# Altium PCB ScreenBoard.PcbDoc
Units mm, origin at the board's own origin, x right, y up, seen from the top; angles counter-clockwise.
Board outline 88.14 x 71.63 mm, 2 copper layers (Top Layer, Bottom Layer); 43 components, 41 nets, 216 pads, 1557 vias.
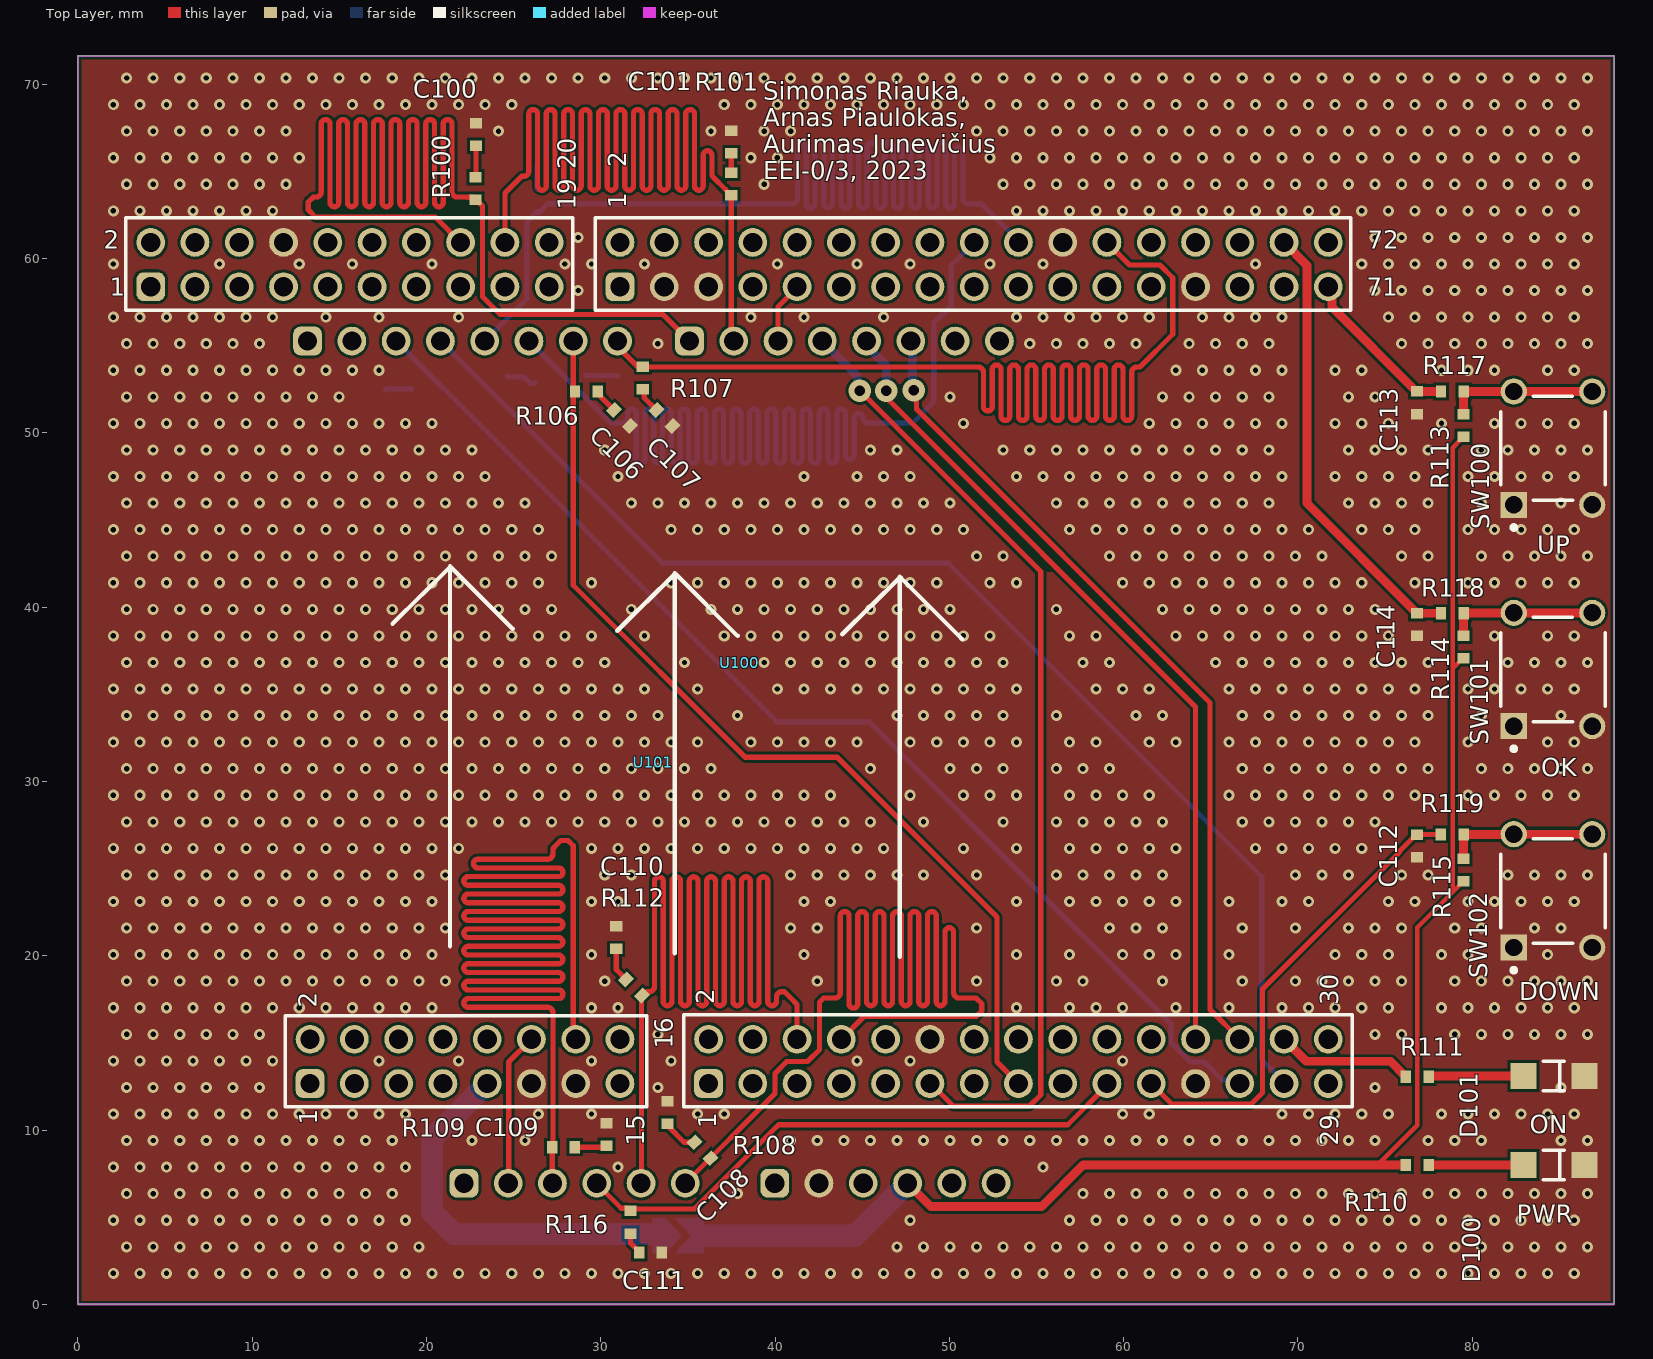
[diagram p0: Top Layer view]
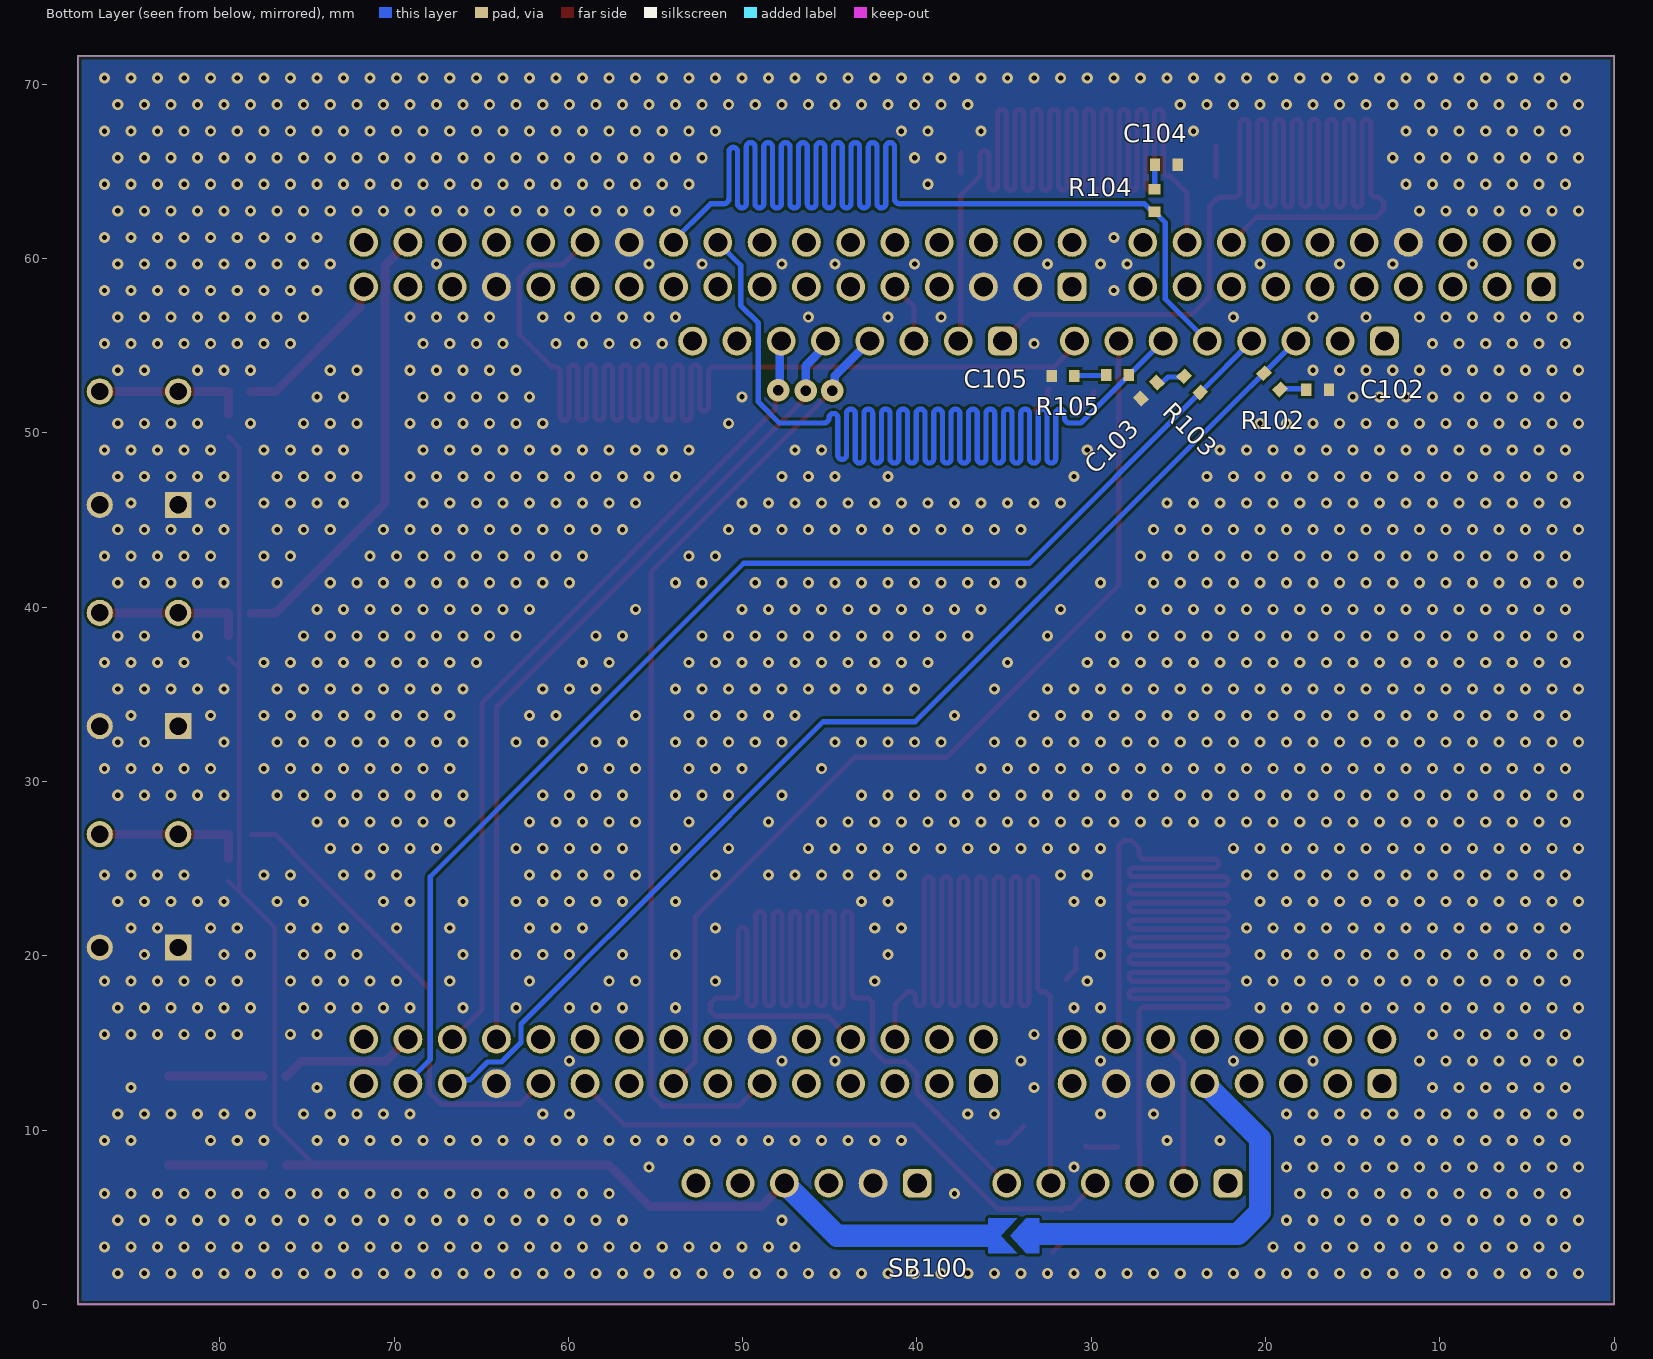
[diagram p1: Bottom Layer view, seen from below]

## Layer stack, top to bottom
Top Solder: solder mask 0.0102, Solder Resist, Dk 3.5
Top Layer: signal copper 0.0356
Dielectric 1: dielectric 0.32, FR-4, Dk 4.8
Bottom Layer: signal copper 0.0356
Bottom Solder: solder mask 0.0102, Solder Resist, Dk 3.5

## Board outline
0,0 88.138,0 88.138,71.628 0,71.628

## Design rules (kind name [scope] priority, off if disabled: settings)
Clearance [All] p1: gap=0.152 ignorepadtopadclearanceinfootprint=FALSE
HoleSize [All] p1: absolutevalues=TRUE maxlimit=2.54 minlimit=0.3 maxpercent=80.000 minpercent=20.000
MinimumAnnularRing [All] p1: minimumring=0.152
MinimumSolderMaskSliver [All] p1: minsoldermaskwidth=0.152
PolygonConnect [All] p1: connectstyle=Direct reliefconductorwidth=0.254 reliefentries=4 polygonreliefangle="90 Angle" airgapwidth=0.254
RoutingVias [All] p1: holewidth=0.3 width=0.604 viastyle="Through Hole" minholewidth=0.3 minwidth=0.604 maxholewidth=100 maxwidth=1.27
SilkToSolderMaskClearance [IsPad] p1: minsilkscreentomaskgap=0.15 clearancetoexposedcopper=TRUE
SolderMaskExpansion [All] p1: expansion=0.102 istentingtop=FALSE
Width [All] p1: maxlimit=1.27 minlimit=0.152 preferedwidth=0.254 minimp=50.000000 maximp=50.000000 favimp=50.000000
27 further rules are at their usual default settings.

## Components (designator, comment, footprint, x,y, rotation, side; value= is the part's Value field where it differs from the comment)
C100 "0.1uF" 0402_footprint 22.835,66.472 r90 top
C101 "0.1uF" 0402_footprint 37.49,66.04 r90 top
C102 "0.1uF" 0402_footprint 17.658,52.476 r180 bottom
C103 "0.1uF" 0402_footprint 26.233,52.888 r315 bottom
C104 "0.1uF" 0402_footprint 26.34,65.38 r180 bottom
C105 "0.1uF" 0402_footprint 30.963,53.264 r0 bottom
C106 "0.1uF" 0402_footprint 30.755,51.313 r315 top
C107 "0.1uF" 0402_footprint 33.198,51.308 r315 top
C108 "0.1uF" 0402_footprint 33.833,10.359 r90 top
C109 "0.1uF" 0402_footprint 30.328,9.093 r90 top
C110 "0.1uF" 0402_footprint 30.886,20.392 r90 top
C111 "0.1uF" 0402_footprint 32.203,2.972 r0 top
C112 "0.1uF" 0402_footprint 76.835,26.949 r270 top
C113 "33nF" 0402_footprint 76.835,52.375 r270 top
C114 "33nF" 0402_footprint 76.835,39.649 r270 top
D100 "HSMG-C150" FP-HSMG-C150-MFG 84.684,8.001 r180 top
D101 "HSMG-C150" FP-HSMG-C150-MFG 84.684,13.106 r180 top
R100 "4.7kOhm" 0402_footprint 22.809,64.668 r270 top
R101 "4.7kOhm" 0402_footprint 37.49,63.627 r90 top
R102 "4.7kOhm" 0402_footprint 19.172,52.497 r45 bottom
R103 "4.7kOhm" 0402_footprint 23.749,52.324 r45 bottom
R104 "4.7kOhm" 0402_footprint 26.365,63.983 r270 bottom
R105 "4.7kOhm" 0402_footprint 27.834,53.315 r0 bottom
R106 "4.7kOhm" 0402_footprint 29.82,52.375 r180 top
R107 "4.7kOhm" 0402_footprint 32.41,52.502 r90 top
R108 "4.7kOhm" 0402_footprint 36.297,8.382 r135 top
R109 "4.7kOhm" 0402_footprint 28.503,9.017 r180 top
R110 "150" 0402_footprint 77.495,8.001 r180 top
R111 "43" 0402_FOOTPRINT 77.495,13.056 r180 top
R112 "4.7kOhm" 0402_footprint 32.364,17.724 r135 top
R113 "10k" 0402_footprint 79.502,51.079 r270 top
R114 "10k" 0402_footprint 79.502,38.359 r270 top
R115 "0402" 0402_footprint 79.502,25.578 r270 top
R116 "4.7kOhm" 0402_footprint 31.699,4.059 r90 top
R117 "2k" 0402_footprint 79.507,52.375 r180 top
R118 "2k" 0402_footprint 79.507,39.649 r180 top
R119 "0402" 0402_footprint 79.502,26.949 r180 top
SB100 "Solder_bridge" SOLDER_BRIDGE 33.909,3.937 r0 bottom
SW100 "1825910-6" TECO-1825910-6_V 84.633,49.119 r90 top
SW101 "1825910-6" TECO-1825910-6_V 84.633,36.424 r90 top
SW102 "1825910-6" TECO-1825910-6_V 84.633,23.724 r90 top locked
U100 "NUCLEO-H755ZL_Zio" H7/H5_NUCLEO_ZIO -17.158,6.108 r90 top locked
U101 "3'5_LCD_ARDUINO" 3'5_LCD_ARDUINO 22.149,6.95 r90 top locked

## Footprints (in the part's own frame and the unit in brackets; to place one, negate y for a bottom-side part, rotate by r counter-clockwise, add the part's x,y. Pads: shape width x height; smd on the part's side, far side on the other; paste and mask are expansions set on the pad)
3'5_LCD_ARDUINO [mm]
  rrect50% 1.65x1.65 hole 1.1: 1(0,0) 7(0,-17.83) 13(48.32,8.97) 21(48.32,-12.94)
  round 1.65 hole 1.1: 2(0,-2.54) 3(0,-5.08) 4(0,-7.62) 5(0,-10.16) 6(0,-12.7) 8(0,-20.37) 9(0,-22.91) 10(0,-25.45) 11(0,-27.99) 12(0,-30.53) 14(48.32,6.43) 15(48.32,3.89) 16(48.32,1.35) 17(48.32,-1.19) 18(48.32,-3.73) 19(48.32,-6.27) 20(48.32,-8.81) 22(48.32,-15.48) 23(48.32,-18.02) 24(48.32,-20.56) 25(48.32,-23.1) 26(48.32,-25.64) 27(48.32,-28.18) 28(48.32,-30.72)
  silkscreen extent 13,-28.6 35.4,4.1
0402_footprint [mm]
  rect 0.6x0.7 smd: 1(0,0) 2(1.3,0)
0402_FOOTPRINT [mm]
  rect 0.6x0.7 smd: 1(0,0) 2(1.3,0)
FP-HSMG-C150-MFG [mm]
  rect 1.5x1.5 smd paste+0 mask+0: 1(-1.75,0) 2(1.75,0)
  silkscreen extent -0.6,-0.85 0.6,0.85, body extent -2.6,-0.95 2.6,0.95, height 0.25
H7/H5_NUCLEO_ZIO [mm]
  rrect50% 1.65x1.65 hole 1.1: 1(6.56,-30.48) 17(6.56,-53.34) 47(52.28,-21.336) 67(52.28,-48.26)
  round 1.65 hole 1.1: 2(9.1,-30.48) 3(6.56,-33.02) 4(9.1,-33.02) 5(6.56,-35.56) 6(9.1,-35.56) 7(6.56,-38.1) 8(9.1,-38.1) 9(6.56,-40.64) 10(9.1,-40.64) 11(6.56,-43.18) 12(9.1,-43.18) 13(6.56,-45.72) 14(9.1,-45.72) 15(6.56,-48.26) 16(9.1,-48.26) 18(9.1,-53.34) 19(6.56,-55.88) 20(9.1,-55.88) 21(6.56,-58.42) 22(9.1,-58.42) 23(6.56,-60.96) 24(9.1,-60.96) 25(6.56,-63.5) 26(9.1,-63.5) 27(6.56,-66.04) 28(9.1,-66.04) 29(6.56,-68.58) 30(9.1,-68.58) 31(6.56,-71.12) 32(9.1,-71.12) 33(6.56,-73.66) 34(9.1,-73.66) 35(6.56,-76.2) 36(9.1,-76.2) 37(6.56,-78.74) 38(9.1,-78.74) 39(6.56,-81.28) 40(9.1,-81.28) 41(6.56,-83.82) 42(9.1,-83.82) 43(6.56,-86.36) 44(9.1,-86.36) 45(6.56,-88.9) 46(9.1,-88.9) 48(54.82,-21.336) 49(52.28,-23.876) 50(54.82,-23.876) 51(52.28,-26.416) 52(54.82,-26.416) 53(52.28,-28.956) 54(54.82,-28.956) 55(52.28,-31.496) 56(54.82,-31.496) 57(52.28,-34.036) 58(54.82,-34.036) 59(52.28,-36.576) 60(54.82,-36.576) 61(52.28,-39.116) 62(54.82,-39.116) 63(52.28,-41.656) 64(54.82,-41.656) 65(52.28,-44.196) 66(54.82,-44.196) 68(54.82,-48.26) 69(52.28,-50.8) 70(54.82,-50.8) 71(52.28,-53.34) 72(54.82,-53.34) 73(52.28,-55.88) 74(54.82,-55.88) 75(52.28,-58.42) 76(54.82,-58.42) 77(52.28,-60.96) 78(54.82,-60.96) 79(52.28,-63.5) 80(54.82,-63.5) 81(52.28,-66.04) 82(54.82,-66.04) 83(52.28,-68.58) 84(54.82,-68.58) 85(52.28,-71.12) 86(54.82,-71.12) 87(52.28,-73.66) 88(54.82,-73.66) 89(52.28,-76.2) 90(54.82,-76.2) 91(52.28,-78.74) 92(54.82,-78.74) 93(52.28,-81.28) 94(54.82,-81.28) 95(52.28,-83.82) 96(54.82,-83.82) 97(52.28,-86.36) 98(54.82,-86.36) 99(52.28,-88.9) 100(54.82,-88.9)
  silkscreen extent 5.21,-90.26 56.22,-19.92
SOLDER_BRIDGE [mil]
  round 1 smd mask+1.97: 1(-36,1) 2(77,0)
  Top Layer pour cut-out: -7,42.98 -7,-43 11,-43 50.85,0.04 11,42.98
  Top Layer region: -36,-39.37 -36,39.37 -6.97,39.37 28.46,0 -6.97,-39.37
  Top Layer region: 79,39.37 79,-39.42 13,-40 50,0 13,39.37
TECO-1825910-6_V [mm] "Switch, 4-Leads, Body 5.99x5.99mm"
  rect 1.5x1.5 hole 0.99: 1(-3.25,2.25)
  round 1.5 hole 0.99: 2(3.25,2.25) 3(-3.25,-2.25) 4(3.25,-2.25)
  silkscreen extent -4.67,-2.99 2.99,3, body extent -3,-2.99 2.99,3, height 5

## Part data
C100 C101 C102 C103 C104 C105 C106 C107 C108 C109 C110 C111 C112 C113 C114: library part Capacitor_0402, "0402 capacitor"
D100 D101: library part CMP-2000-05061-2, "LED GREEN DIFFUSED 1206 SMD", Colour=Green, Forward Current=20mA, Forward Voltage=2.2V, Manufacturer=Broadcom, Max Junction Temp=+95°C, Power Dissipation=65mW, Reverse Voltage=5V, Temperature="-40°C to +85°C", Temperature Range High=+85°C, Temperature Range Low=-40°C, Automotive=No, Category=Diode, ComponentLink2Description=Buy, ComponentLink2URL=https://www.mouser.lt/ProductDetail/Wurth-Elektronik/156120RS75000?qs=2kOmHSv6VfTlw4DhG%252BTIQw%3D%3D, Device Class L1=Optoelectronics, Device Class L2=LEDs, Device Class L3=unset, Digikey Description="LED GREEN DIFFUSED 1206 SMD", Height=1.2mm, Ipc Land Pattern Name=DIOCP320160X55, Lead Free=Yes, Led Orientation="Top View", Luminous Intensity=15mcd, Manufacturer Part Number=HSMG-C150, Mouser Description="LED Uni-Color Green 570nm 2-Pin Chip LED T/R", Octopart=https://octopart.com/hsmg-c150-broadcom-71131304, Package=HSMG-C150, Peak Emmision Wavelength=570nm, RoHS=TRUE, Viewing Angle=170°, Wavelength=572nm
R100 R101 R102 R103 R104 R105 R106 R107 R108 R109 R110 R111 R112 R113 R114 R115 R116 R117 R118 R119: library part Resistor_0402, "0402 resistor"
SW100 SW101 SW102: library part CMP-1684-00021-1, "Tact Switch, SPST-NO, 0.05 A, -35 to 85 degC, 4-Pin THD, RoHS, Bulk", Actuator Color=Black, Contact Rating @ Voltage=0.05A@24VDC, Dielectric Strength=500VAC, Manufacturer="TE Connectivity", Maximum AC Voltage Rating=N/A, Maximum Contact Resistance=100mOhm, Maximum DC Voltage Rating=24V, Minimum Insulation Resistance=100MOhm, Operating Temperature=-35to85C, Package Description="4-Pin Through Hole Device, Body 5.99 x 5.99 mm, Pitch 6.5 mm", Package Reference=THD, Actuator Length=1.4mm, Actuator Material=PolybutyleneTerephthalate, Actuator Style=RoundButton, Base Material=N/A, Body Orientation=Straight, Bushing Type=Unthreaded, ComponentLink1Description=Buy, ComponentLink1URL=https://www.mouser.lt/ProductDetail/CUI-Devices/TS02-66-55-BK-260-LCR-D?qs=A6eO%252BMLsxmT6x4NEvNu8bQ%3D%3D, Contact Material=CopperAlloy, Contact Plating=Silver, Datasheet URL=http://www.te.com/commerce/DocumentDelivery/DDEController?Action=showdoc&DocId=Customer+Drawing%7F1825910%7FC9%7Fpdf%7FEnglish%7FENG_CD_1825910_C9.pdf%7F1825910-6, Datasheet Version="Rev. C9", Dimension=5.99x5mm, Electrical Life=100000Cycles, Family=1825910, Function=MomentaryContact, Housing Material=N/A, Illumination=N/R, Manufacturer URL=http://www.te.com, Mechanical Life=100000Cycles, Mounting=ThroughHole, Packaging=N/A, Part No=1825910-6, Pole Throw Configuration=SPST, Product Weight=N/A, RoHS=Yes, Seal Description=N/A, Seal Location=N/A, Switch Configuration=OFF(ON), Terminal Type=PCPins, Thread Size=N/R

## Via types
v1: diameter 0.635, hole 0.305, Top Layer to Bottom Layer, tented both sides, 1554 vias
v2: diameter 1.3, hole 0.6, Top Layer to Bottom Layer, tented both sides, 3 vias

## Nets (pads, with @x,y where several pads share a name; then routed paths per layer and width w, separated by ;. In a path a pad name is that pad's centre, name@x,y a point inside that pad or via, vN(x,y) a via of type N, cw(c..) or ccw(c..) an arc to the next point about the centre after c; other vN are vias at no path point)
5V: SB100.1 U100.9 | length 22.2
  Bottom Layer w1.27: U100.9 20.32,9.506 20.32,5.291 21.581,4.03 33.346,4.03
BTN_1: C113.1 R117.2 U100.99 | length 9.5
  Top Layer w0.508: U100.99 71.96,58.169 71.96,57.199 76.785,52.375 C113.1 R117.2
BTN_2: C114.1 R118.2 U100.98 | length 25.8
  Top Layer w0.508: U100.98 70.51,59.619 70.51,45.974 76.739,39.745 76.739,39.695 76.785,39.649 R118.2
BTN_3: C112.1 R119.2 U100.37 | length 27
  Top Layer w0.3: U100.37 62.769,11.481 67.31,11.481 67.971,12.142 67.971,18.085 75.828,25.942 75.828,25.992 76.785,26.949 C112.1 R119.2
BTN_PWR: R110.2 R113.2 R114.2 R115.2 SB100.2 U101.10 | length 88.7
  Top Layer w0.254: 74.574,8.001 76.848,10.275 76.848,21.624 78.945,23.721 ; R115.2 78.945,23.721 ; R114.2 79.452,37.059 78.873,36.48 ; R113.2 79.452,49.779 79.279,49.606 79.279,49.556 78.873,49.15 78.873,36.48 ; 78.873,36.48 78.873,23.794 78.945,23.721
  Top Layer w0.508: U101.10 48.935,5.613 55.297,5.613 57.685,8.001 74.574,8.001 R110.2
  Bottom Layer w1.27: SB100.2 44.586,3.937 U101.10
CS: R109.2 U100.14 U101.3 | length 128
  Top Layer w0.3: U101.3 27.216,6.962 27.216,9.004 R109.2 27.253,9.067 27.253,16.59 27.253,16.74 ccw(c26.953,16.74) 26.953,17.04 22.39,17.04 cw(c22.39,17.29) 22.39,17.54 27.573,17.54 ccw(c27.573,17.79) 27.573,18.04 22.39,18.04 cw(c22.39,18.29) 22.39,18.54 27.573,18.54 ccw(c27.573,18.79) 27.573,19.04 22.39,19.04 cw(c22.39,19.29) 22.39,19.54 27.573,19.54 ccw(c27.573,19.79) 27.573,20.04 22.39,20.04 cw(c22.39,20.29) 22.39,20.54 27.573,20.54 ccw(c27.573,20.79) 27.573,21.04 22.39,21.04 cw(c22.39,21.29) 22.39,21.54 27.573,21.54 ccw(c27.573,21.79) 27.573,22.04 22.39,22.04 cw(c22.39,22.29) 22.39,22.54 27.573,22.54 ccw(c27.573,22.79) 27.573,23.04 22.39,23.04 cw(c22.39,23.29) 22.39,23.54 27.573,23.54 ccw(c27.573,23.79) 27.573,24.04 22.39,24.04 cw(c22.39,24.29) 22.39,24.54 27.573,24.54 ccw(c27.573,24.79) 27.573,25.04 22.94,25.04 cw(c22.94,25.29) 22.94,25.54 26.953,25.54 ccw(c26.953,25.84) 27.253,25.84 27.253,26.161 27.503,26.41 27.704,26.612 28.125,26.612 28.423,26.314 28.423,15.347 U100.14
D0: R100.2 U100.62 U101.21 | length 113.9
  Top Layer w0.3: U100.62 20.512,62.374 13.648,62.374 13.211,62.811 13.211,63.232 13.508,63.53 13.513,63.53 13.663,63.53 ccw(c13.663,63.83) 13.963,63.83 13.963,67.725 cw(c14.213,67.725) 14.463,67.725 14.463,63.224 ccw(c14.713,63.224) 14.963,63.224 14.963,67.725 cw(c15.213,67.725) 15.463,67.725 15.463,63.224 ccw(c15.713,63.224) 15.963,63.224 15.963,67.725 cw(c16.213,67.725) 16.463,67.725 16.463,63.224 ccw(c16.713,63.224) 16.963,63.224 16.963,67.725 cw(c17.213,67.725) 17.463,67.725 17.463,63.224 ccw(c17.713,63.224) 17.963,63.224 17.963,67.725 cw(c18.213,67.725) 18.463,67.725 18.463,63.224 ccw(c18.713,63.224) 18.963,63.224 18.963,67.725 cw(c19.213,67.725) 19.463,67.725 19.463,63.224 ccw(c19.713,63.224) 19.963,63.224 19.963,67.725 cw(c20.212,67.725) 20.462,67.725 20.462,63.224 ccw(c20.712,63.224) 20.962,63.224 20.962,67.725 cw(c21.212,67.725) 21.462,67.725 21.462,63.83 ccw(c21.762,63.83) 21.762,63.53 22.361,63.53 22.372,63.518 22.659,63.518 R100.2 22.859,63.368 23.216,63.012 23.216,57.81 24.232,56.794 33.564,56.794 U101.21
D1: R101.1 U100.64 U101.22 | length 116
  Top Layer w0.3: U100.64 24.498,63.753 25.424,64.679 25.464,64.719 25.574,64.719 ccw(c25.574,65.019) 25.874,65.019 25.874,68.301 cw(c26.124,68.301) 26.374,68.301 26.374,64.169 ccw(c26.624,64.169) 26.874,64.169 26.874,68.301 cw(c27.124,68.301) 27.374,68.301 27.374,64.169 ccw(c27.624,64.169) 27.874,64.169 27.874,68.301 cw(c28.124,68.301) 28.374,68.301 28.374,64.169 ccw(c28.624,64.169) 28.874,64.169 28.874,68.301 cw(c29.124,68.301) 29.374,68.301 29.374,64.169 ccw(c29.624,64.169) 29.874,64.169 29.874,68.301 cw(c30.124,68.301) 30.374,68.301 30.374,64.169 ccw(c30.624,64.169) 30.874,64.169 30.874,68.301 cw(c31.124,68.301) 31.374,68.301 31.374,64.169 ccw(c31.624,64.169) 31.874,64.169 31.874,68.301 cw(c32.124,68.301) 32.374,68.301 32.374,64.169 ccw(c32.624,64.169) 32.874,64.169 32.874,68.301 cw(c33.124,68.301) 33.374,68.301 33.374,64.169 ccw(c33.624,64.169) 33.874,64.169 33.874,68.301 cw(c34.124,68.301) 34.374,68.301 34.374,64.169 ccw(c34.624,64.169) 34.874,64.169 34.874,68.301 cw(c35.124,68.301) 35.374,68.301 35.374,64.169 ccw(c35.624,64.169) 35.874,64.169 35.874,65.937 cw(c36.124,65.937) 36.374,65.937 36.374,64.868 ccw(c36.674,64.868) 36.461,64.656 37.141,63.976 R101.1 37.49,55.408 U101.22
D2: R102.2 U100.41 U101.15 | length 66.7
  Bottom Layer w0.3: U101.15 R102.2@20.142,53.386 ; R102.2 20.121,53.386 R102.2@20.142,53.386 ; 59.494,19.306 62.709,16.092 62.709,15.025 63.834,13.899 64.632,13.899 65.648,12.883 66.447,12.883 U100.41 ; 59.502,19.314 56.012,22.804 45.39,33.426 40.102,33.426 21.631,51.897 R102.2@20.142,53.386
D3: R103.1 U100.43 U101.16 | length 72.4
  Bottom Layer w0.3: U101.16 23.745,52.324 R103.1 23.749,52.32 33.549,42.52 49.936,42.52 67.92,24.536 67.92,14.046 69.303,12.662 69.208,12.662 U100.43
D4: R104.2 U100.86 U101.17 | length 107.1
  Bottom Layer w0.3: U101.17 25.756,57.687 25.756,62.073 26.165,62.483 26.165,62.533 26.315,62.683 R104.2 ; R104.2@26.451,62.646 26.949,63.144 40.837,63.144 40.987,63.144 ccw(c40.987,63.444) 41.287,63.444 41.287,66.402 cw(c41.537,66.402) 41.787,66.402 41.787,63.155 ccw(c42.037,63.155) 42.287,63.155 42.287,66.402 cw(c42.537,66.402) 42.787,66.402 42.787,63.155 ccw(c43.037,63.155) 43.287,63.155 43.287,66.402 cw(c43.537,66.402) 43.787,66.402 43.787,63.155 ccw(c44.037,63.155) 44.287,63.155 44.287,66.402 cw(c44.537,66.402) 44.787,66.402 44.787,63.155 ccw(c45.037,63.155) 45.287,63.155 45.287,66.402 cw(c45.537,66.402) 45.787,66.402 45.787,63.155 ccw(c46.037,63.155) 46.287,63.155 46.287,66.402 cw(c46.537,66.402) 46.787,66.402 46.787,63.155 ccw(c47.037,63.155) 47.287,63.155 47.287,66.402 cw(c47.537,66.402) 47.787,66.402 47.787,63.155 ccw(c48.037,63.155) 48.287,63.155 48.287,66.402 cw(c48.537,66.402) 48.787,66.402 48.787,63.155 ccw(c49.037,63.155) 49.287,63.155 49.287,66.402 cw(c49.537,66.402) 49.787,66.402 49.787,63.155 ccw(c50.037,63.155) 50.287,63.155 50.287,66.134 cw(c50.537,66.134) 50.787,66.134 50.787,63.444 ccw(c51.087,63.444) 51.087,63.144 51.841,63.144 51.905,63.081 ; 51.907,63.079 54.063,60.922 53.968,60.922 U100.86
D5: R105.1 U100.84 U101.18 | length 111
  Bottom Layer w0.3: U101.18 30.582,50.567 31.09,50.567 31.24,50.567 ccw(c31.24,50.867) 31.54,50.867 31.54,51.117 cw(c31.79,51.117) 32.04,51.117 32.04,48.517 ccw(c32.29,48.517) 32.54,48.517 32.54,51.117 cw(c32.79,51.117) 33.04,51.117 33.04,48.517 ccw(c33.29,48.517) 33.54,48.517 33.54,51.117 cw(c33.79,51.117) 34.04,51.117 34.04,48.517 ccw(c34.29,48.517) 34.54,48.517 34.54,51.117 cw(c34.79,51.117) 35.04,51.117 35.04,48.517 ccw(c35.29,48.517) 35.54,48.517 35.54,51.117 cw(c35.79,51.117) 36.04,51.117 36.04,48.517 ccw(c36.29,48.517) 36.54,48.517 36.54,51.117 cw(c36.79,51.117) 37.04,51.117 37.04,48.517 ccw(c37.29,48.517) 37.54,48.517 37.54,51.117 cw(c37.79,51.117) 38.04,51.117 38.04,48.517 ccw(c38.29,48.517) 38.54,48.517 38.54,51.117 cw(c38.79,51.117) 39.04,51.117 39.04,48.517 ccw(c39.29,48.517) 39.54,48.517 39.54,51.117 cw(c39.79,51.117) 40.04,51.117 40.04,48.517 ccw(c40.29,48.517) 40.54,48.517 40.54,51.117 cw(c40.79,51.117) 41.04,51.117 41.04,48.517 ccw(c41.29,48.517) 41.54,48.517 41.54,51.117 cw(c41.79,51.117) 42.04,51.117 42.04,48.517 ccw(c42.29,48.517) 42.54,48.517 42.54,51.117 cw(c42.79,51.117) 43.04,51.117 43.04,48.517 ccw(c43.29,48.517) 43.54,48.517 43.54,51.117 cw(c43.79,51.117) 44.04,51.117 44.04,48.73 ccw(c44.29,48.73) 44.54,48.73 44.54,50.867 cw(c44.79,50.867) 45.04,50.867 ccw(c45.34,50.867) 45.34,50.567 46.279,50.567 47.9,50.567 49.097,51.764 49.097,56.301 50.113,57.316 50.113,59.619 U100.84
D6: R106.2 U100.31 U101.19 | length 56.4
  Top Layer w0.3: U101.19 28.419,52.476 R106.2 28.419,52.274 28.419,41.253 38.278,31.394 43.559,31.394 52.73,22.223 52.73,13.899 U100.31
D7: R107.2 U100.90 U101.20 | length 93.3
  Top Layer w0.3: U101.20 30.959,54.961 31.41,54.509 31.41,54.493 32.129,53.773 50.814,53.773 51.659,53.773 cw(c51.659,53.473) 51.959,53.473 51.959,51.506 ccw(c52.209,51.506) 52.459,51.506 52.459,53.645 cw(c52.709,53.645) 52.959,53.645 52.959,50.962 ccw(c53.209,50.962) 53.459,50.962 53.459,53.645 cw(c53.709,53.645) 53.959,53.645 53.959,50.962 ccw(c54.209,50.962) 54.459,50.962 54.459,53.645 cw(c54.709,53.645) 54.959,53.645 54.959,50.962 ccw(c55.209,50.962) 55.459,50.962 55.459,53.645 cw(c55.709,53.645) 55.959,53.645 55.959,50.962 ccw(c56.209,50.962) 56.459,50.962 56.459,53.645 cw(c56.709,53.645) 56.959,53.645 56.959,50.962 ccw(c57.209,50.962) 57.459,50.962 57.459,53.645 cw(c57.709,53.645) 57.959,53.645 57.959,50.962 ccw(c58.209,50.962) 58.459,50.962 58.459,53.645 cw(c58.709,53.645) 58.959,53.645 58.959,50.962 ccw(c59.209,50.962) 59.459,50.962 59.459,53.645 cw(c59.709,53.645) 59.959,53.645 59.959,50.962 ccw(c60.209,50.962) 60.459,50.962 60.459,53.473 cw(c60.759,53.473) 60.759,53.773 60.909,53.773 60.931,53.773 62.813,55.656 62.813,58.898 62.077,59.634 60.336,59.634 U100.90
GND: C100.2 C101.2 C102.2 C103.2 C104.2 C105.2 C106.2 C107.2 C108.2 C109.2 C110.2 C111.2 C112.2 C113.2 C114.2 D100.1 D101.1 SW100.1 SW100.3 SW101.1 SW101.3 SW102.1 SW102.3 U100.11 U100.13 U100.28 U100.39 U100.54 U100.69 U100.71 U100.88 U100.93 U101.8
  other v1: 2.032,1.778 3.556,1.778 5.08,1.778 6.604,1.778 8.128,1.778 9.652,1.778 11.176,1.778 12.7,1.778 14.224,1.778 15.748,1.778 17.272,1.778 18.796,1.778 20.32,1.778 21.844,1.778 23.368,1.778 24.892,1.778 26.416,1.778 27.94,1.778 29.464,1.778 30.988,1.778 32.512,1.778 34.036,1.778 35.56,1.778 37.084,1.778 38.608,1.778 40.132,1.778 41.656,1.778 43.18,1.778 44.704,1.778 46.228,1.778 47.752,1.778 49.276,1.778 50.8,1.778 52.324,1.778 53.848,1.778 55.372,1.778 56.896,1.778 58.42,1.778 59.944,1.778 61.468,1.778 62.992,1.778 64.516,1.778 66.04,1.778 67.564,1.778 69.088,1.778 70.612,1.778 72.136,1.778 73.66,1.778 75.184,1.778 76.708,1.778 78.232,1.778 79.756,1.778 81.28,1.778 82.804,1.778 84.328,1.778 85.852,1.778 2.794,3.302 4.318,3.302 5.842,3.302 7.366,3.302 8.89,3.302 10.414,3.302 11.938,3.302 13.462,3.302 14.986,3.302 16.51,3.302 18.034,3.302 19.558,3.302 46.99,3.302 48.514,3.302 50.038,3.302 51.562,3.302 53.086,3.302 54.61,3.302 56.134,3.302 57.658,3.302 59.182,3.302 60.706,3.302 62.23,3.302 63.754,3.302 65.278,3.302 66.802,3.302 68.326,3.302 69.85,3.302 71.374,3.302 72.898,3.302 74.422,3.302 75.946,3.302 77.47,3.302 78.994,3.302 80.518,3.302 82.042,3.302 83.566,3.302 85.09,3.302 86.614,3.302 2.032,4.826 3.556,4.826 5.08,4.826 6.604,4.826 8.128,4.826 9.652,4.826 11.176,4.826 12.7,4.826 14.224,4.826 15.748,4.826 17.272,4.826 18.796,4.826 47.752,4.826 56.896,4.826 58.42,4.826 59.944,4.826 61.468,4.826 62.992,4.826 64.516,4.826 66.04,4.826 67.564,4.826 69.088,4.826 70.612,4.826 72.136,4.826 73.66,4.826 75.184,4.826 76.708,4.826 78.232,4.826 79.756,4.826 81.28,4.826 82.804,4.826 84.328,4.826 85.852,4.826 2.794,6.35 4.318,6.35 5.842,6.35 7.366,6.35 8.89,6.35 10.414,6.35 11.938,6.35 13.462,6.35 14.986,6.35 16.51,6.35 18.034,6.35 37.846,6.35 57.658,6.35 59.182,6.35 60.706,6.35 62.23,6.35 63.754,6.35 65.278,6.35 66.802,6.35 68.326,6.35 69.85,6.35 71.374,6.35 72.898,6.35 74.422,6.35 75.946,6.35 77.47,6.35 78.994,6.35 80.518,6.35 82.042,6.35 83.566,6.35 85.09,6.35 86.614,6.35 2.032,7.874 3.556,7.874 5.08,7.874 6.604,7.874 8.128,7.874 9.652,7.874 11.176,7.874 12.7,7.874 14.224,7.874 15.748,7.874 17.272,7.874 18.796,7.874 30.988,7.874 55.372,7.874 2.794,9.398 4.318,9.398 5.842,9.398 7.366,9.398 8.89,9.398 10.414,9.398 11.938,9.398 13.462,9.398 14.986,9.398 16.51,9.398 18.034,9.398 22.606,9.398 25.654,9.398 40.894,9.398 42.418,9.398 43.942,9.398 45.466,9.398 46.99,9.398 48.514,9.398 50.038,9.398 51.562,9.398 53.086,9.398 54.61,9.398 56.134,9.398 57.658,9.398 59.182,9.398 60.706,9.398 62.23,9.398 63.754,9.398 65.278,9.398 66.802,9.398 68.326,9.398 69.85,9.398 71.374,9.398 72.898,9.398 74.422,9.398 77.47,9.398 78.994,9.398 80.518,9.398 85.09,9.398 86.614,9.398 2.032,10.922 3.556,10.922 5.08,10.922 6.604,10.922 8.128,10.922 9.652,10.922 11.176,10.922 12.7,10.922 14.224,10.922 15.748,10.922 17.272,10.922 18.796,10.922 26.416,10.922 29.464,10.922 35.56,10.922 37.084,10.922 59.944,10.922 61.468,10.922 69.088,10.922 70.612,10.922 72.136,10.922 73.66,10.922 75.184,10.922 78.232,10.922 79.756,10.922 81.28,10.922 82.804,10.922 84.328,10.922 85.852,10.922 2.794,12.446 4.318,12.446 5.842,12.446 7.366,12.446 8.89,12.446 10.414,12.446 33.274,12.446 74.422,12.446 85.09,12.446 2.032,13.97 3.556,13.97 5.08,13.97 6.604,13.97 8.128,13.97 9.652,13.97 11.176,13.97 17.272,13.97 21.844,13.97 29.464,13.97 34.036,13.97 44.704,13.97 47.752,13.97 59.944,13.97 2.794,15.494 4.318,15.494 5.842,15.494 7.366,15.494 8.89,15.494 10.414,15.494 33.274,15.494 74.422,15.494 75.946,15.494 78.994,15.494 80.518,15.494 82.042,15.494 83.566,15.494 85.09,15.494 86.614,15.494 2.032,17.018 3.556,17.018 5.08,17.018 6.604,17.018 8.128,17.018 9.652,17.018 11.176,17.018 12.7,17.018 14.224,17.018 15.748,17.018 17.272,17.018 18.796,17.018 20.32,17.018 29.464,17.018 30.988,17.018 53.848,17.018 56.896,17.018 58.42,17.018 59.944,17.018 62.992,17.018 66.04,17.018 69.088,17.018 70.612,17.018 72.136,17.018 73.66,17.018 75.184,17.018 78.232,17.018 79.756,17.018 81.28,17.018 82.804,17.018 84.328,17.018 85.852,17.018 2.794,18.542 4.318,18.542 5.842,18.542 7.366,18.542 8.89,18.542 10.414,18.542 11.938,18.542 13.462,18.542 14.986,18.542 16.51,18.542 18.034,18.542 19.558,18.542 21.082,18.542 30.226,18.542 42.418,18.542 51.562,18.542 56.134,18.542 57.658,18.542 62.23,18.542 66.802,18.542 69.85,18.542 71.374,18.542 72.898,18.542 74.422,18.542 75.946,18.542 78.994,18.542 80.518,18.542 82.042,18.542 83.566,18.542 85.09,18.542 86.614,18.542 2.032,20.066 3.556,20.066 5.08,20.066 6.604,20.066 8.128,20.066 9.652,20.066 11.176,20.066 12.7,20.066 14.224,20.066 15.748,20.066 17.272,20.066 18.796,20.066 20.32,20.066 29.464,20.066 41.656,20.066 53.848,20.066 56.896,20.066 59.944,20.066 61.468,20.066 62.992,20.066 66.04,20.066 72.136,20.066 73.66,20.066 75.184,20.066 78.232,20.066 79.756,20.066 84.328,20.066 2.794,21.59 4.318,21.59 5.842,21.59 7.366,21.59 8.89,21.59 10.414,21.59 11.938,21.59 13.462,21.59 14.986,21.59 16.51,21.59 18.034,21.59 19.558,21.59 21.082,21.59 40.894,21.59 42.418,21.59 51.562,21.59 59.182,21.59 60.706,21.59 62.23,21.59 66.802,21.59 69.85,21.59 72.898,21.59 74.422,21.59 75.946,21.59 78.994,21.59 80.518,21.59 83.566,21.59 85.09,21.59 2.032,23.114 3.556,23.114 5.08,23.114 6.604,23.114 8.128,23.114 9.652,23.114 11.176,23.114 12.7,23.114 14.224,23.114 15.748,23.114 17.272,23.114 18.796,23.114 20.32,23.114 29.464,23.114 30.988,23.114 41.656,23.114 43.18,23.114 53.848,23.114 56.896,23.114 58.42,23.114 59.944,23.114 61.468,23.114 62.992,23.114 66.04,23.114 69.088,23.114 70.612,23.114 75.184,23.114 76.708,23.114 79.756,23.114 81.28,23.114 82.804,23.114 84.328,23.114 85.852,23.114 2.794,24.638 4.318,24.638 5.842,24.638 7.366,24.638 8.89,24.638 10.414,24.638 11.938,24.638 13.462,24.638 14.986,24.638 16.51,24.638 18.034,24.638 19.558,24.638 21.082,24.638 30.226,24.638 31.75,24.638 40.894,24.638 42.418,24.638 43.942,24.638 45.466,24.638 46.99,24.638 48.514,24.638 51.562,24.638 56.134,24.638 57.658,24.638 59.182,24.638 60.706,24.638 62.23,24.638 69.85,24.638 71.374,24.638 72.898,24.638 75.946,24.638 77.47,24.638 82.042,24.638 83.566,24.638 85.09,24.638 86.614,24.638 2.032,26.162 3.556,26.162 5.08,26.162 6.604,26.162 8.128,26.162 9.652,26.162 11.176,26.162 12.7,26.162 14.224,26.162 15.748,26.162 17.272,26.162 18.796,26.162 20.32,26.162 21.844,26.162 29.464,26.162 30.988,26.162 32.512,26.162 34.036,26.162 35.56,26.162 37.084,26.162 38.608,26.162 40.132,26.162 41.656,26.162 43.18,26.162 44.704,26.162 46.228,26.162 50.8,26.162 53.848,26.162 56.896,26.162 58.42,26.162 59.944,26.162 61.468,26.162 62.992,26.162 67.564,26.162 69.088,26.162 70.612,26.162 72.136,26.162 73.66,26.162 2.794,27.686 4.318,27.686 5.842,27.686 7.366,27.686 8.89,27.686 10.414,27.686 11.938,27.686 13.462,27.686 14.986,27.686 16.51,27.686 18.034,27.686 19.558,27.686 21.082,27.686 22.606,27.686 24.13,27.686 25.654,27.686 27.178,27.686 28.702,27.686 30.226,27.686 31.75,27.686 33.274,27.686 34.798,27.686 36.322,27.686 37.846,27.686 39.37,27.686 40.894,27.686 42.418,27.686 43.942,27.686 45.466,27.686 48.514,27.686 53.086,27.686 56.134,27.686 57.658,27.686 59.182,27.686 60.706,27.686 62.23,27.686 66.802,27.686 68.326,27.686 69.85,27.686 71.374,27.686 72.898,27.686 74.422,27.686 2.032,29.21 3.556,29.21 5.08,29.21 6.604,29.21 8.128,29.21 9.652,29.21 11.176,29.21 12.7,29.21 14.224,29.21 15.748,29.21 17.272,29.21 18.796,29.21 20.32,29.21 21.844,29.21 23.368,29.21 24.892,29.21 26.416,29.21 27.94,29.21 29.464,29.21 30.988,29.21 32.512,29.21 34.036,29.21 35.56,29.21 37.084,29.21 38.608,29.21 40.132,29.21 41.656,29.21 43.18,29.21 47.752,29.21 50.8,29.21 52.324,29.21 53.848,29.21 56.896,29.21 58.42,29.21 59.944,29.21 61.468,29.21 66.04,29.21 67.564,29.21 69.088,29.21 70.612,29.21 72.136,29.21 73.66,29.21 75.184,29.21 76.708,29.21 79.756,29.21 81.28,29.21 82.804,29.21 84.328,29.21 85.852,29.21 2.794,30.734 4.318,30.734 5.842,30.734 7.366,30.734 8.89,30.734 10.414,30.734 11.938,30.734 13.462,30.734 14.986,30.734 16.51,30.734 18.034,30.734 19.558,30.734 21.082,30.734 22.606,30.734 24.13,30.734 25.654,30.734 27.178,30.734 28.702,30.734 30.226,30.734 31.75,30.734 33.274,30.734 34.798,30.734 36.322,30.734 45.466,30.734 50.038,30.734 51.562,30.734 53.086,30.734 56.134,30.734 57.658,30.734 59.182,30.734 66.802,30.734 68.326,30.734 69.85,30.734 71.374,30.734 72.898,30.734 74.422,30.734 75.946,30.734 77.47,30.734 80.518,30.734 82.042,30.734 83.566,30.734 85.09,30.734 86.614,30.734 2.032,32.258 3.556,32.258 5.08,32.258 6.604,32.258 8.128,32.258 9.652,32.258 11.176,32.258 12.7,32.258 14.224,32.258 15.748,32.258 17.272,32.258 18.796,32.258 20.32,32.258 21.844,32.258 23.368,32.258 24.892,32.258 26.416,32.258 27.94,32.258 29.464,32.258 30.988,32.258 32.512,32.258 34.036,32.258 35.56,32.258 38.608,32.258 40.132,32.258 41.656,32.258 43.18,32.258 44.704,32.258 47.752,32.258 49.276,32.258 50.8,32.258 52.324,32.258 53.848,32.258 56.896,32.258 58.42,32.258 61.468,32.258 62.992,32.258 66.04,32.258 67.564,32.258 69.088,32.258 70.612,32.258 72.136,32.258 73.66,32.258 75.184,32.258 76.708,32.258 79.756,32.258 84.328,32.258 85.852,32.258 2.794,33.782 4.318,33.782 5.842,33.782 7.366,33.782 8.89,33.782 10.414,33.782 11.938,33.782 13.462,33.782 14.986,33.782 16.51,33.782 18.034,33.782 19.558,33.782 21.082,33.782 22.606,33.782 24.13,33.782 25.654,33.782 27.178,33.782 28.702,33.782 30.226,33.782 31.75,33.782 33.274,33.782 37.846,33.782 46.99,33.782 48.514,33.782 50.038,33.782 51.562,33.782 53.086,33.782 56.134,33.782 60.706,33.782 62.23,33.782 66.802,33.782 68.326,33.782 69.85,33.782 71.374,33.782 72.898,33.782 74.422,33.782 75.946,33.782 77.47,33.782 80.518,33.782 85.09,33.782 2.032,35.306 3.556,35.306 5.08,35.306 6.604,35.306 8.128,35.306 9.652,35.306 11.176,35.306 12.7,35.306 14.224,35.306 15.748,35.306 17.272,35.306 18.796,35.306 20.32,35.306 21.844,35.306 23.368,35.306 24.892,35.306 26.416,35.306 27.94,35.306 29.464,35.306 30.988,35.306 32.512,35.306 35.56,35.306 40.132,35.306 41.656,35.306 43.18,35.306 44.704,35.306 46.228,35.306 47.752,35.306 49.276,35.306 50.8,35.306 52.324,35.306 53.848,35.306 58.42,35.306 59.944,35.306 61.468,35.306 66.04,35.306 67.564,35.306 69.088,35.306 70.612,35.306 72.136,35.306 73.66,35.306 75.184,35.306 76.708,35.306 79.756,35.306 81.28,35.306 82.804,35.306 84.328,35.306 85.852,35.306 2.794,36.83 4.318,36.83 5.842,36.83 7.366,36.83 8.89,36.83 10.414,36.83 11.938,36.83 13.462,36.83 14.986,36.83 16.51,36.83 18.034,36.83 19.558,36.83 21.082,36.83 22.606,36.83 24.13,36.83 25.654,36.83 27.178,36.83 28.702,36.83 30.226,36.83 34.798,36.83 39.37,36.83 40.894,36.83 42.418,36.83 43.942,36.83 45.466,36.83 46.99,36.83 48.514,36.83 50.038,36.83 51.562,36.83 53.086,36.83 57.658,36.83 59.182,36.83 65.278,36.83 66.802,36.83 68.326,36.83 69.85,36.83 71.374,36.83 72.898,36.83 74.422,36.83 75.946,36.83 77.47,36.83 82.042,36.83 83.566,36.83 85.09,36.83 86.614,36.83 2.032,38.354 3.556,38.354 5.08,38.354 6.604,38.354 8.128,38.354 9.652,38.354 11.176,38.354 12.7,38.354 14.224,38.354 15.748,38.354 17.272,38.354 18.796,38.354 20.32,38.354 21.844,38.354 23.368,38.354 24.892,38.354 26.416,38.354 27.94,38.354 29.464,38.354 32.512,38.354 37.084,38.354 38.608,38.354 40.132,38.354 41.656,38.354 43.18,38.354 44.704,38.354 46.228,38.354 47.752,38.354 49.276,38.354 50.8,38.354 52.324,38.354 56.896,38.354 58.42,38.354 62.992,38.354 64.516,38.354 66.04,38.354 67.564,38.354 69.088,38.354 70.612,38.354 72.136,38.354 73.66,38.354 75.184,38.354 81.28,38.354 84.328,38.354 85.852,38.354 2.794,39.878 4.318,39.878 5.842,39.878 7.366,39.878 8.89,39.878 10.414,39.878 11.938,39.878 13.462,39.878 14.986,39.878 16.51,39.878 18.034,39.878 19.558,39.878 21.082,39.878 22.606,39.878 24.13,39.878 25.654,39.878 27.178,39.878 31.75,39.878 36.322,39.878 37.846,39.878 39.37,39.878 40.894,39.878 42.418,39.878 43.942,39.878 45.466,39.878 46.99,39.878 48.514,39.878 50.038,39.878 56.134,39.878 62.23,39.878 63.754,39.878 65.278,39.878 66.802,39.878 68.326,39.878 69.85,39.878 71.374,39.878 72.898,39.878 74.422,39.878 2.032,41.402 3.556,41.402 5.08,41.402 6.604,41.402 8.128,41.402 9.652,41.402 11.176,41.402 12.7,41.402 14.224,41.402 15.748,41.402 17.272,41.402 18.796,41.402 20.32,41.402 21.844,41.402 23.368,41.402 24.892,41.402 26.416,41.402 29.464,41.402 34.036,41.402 35.56,41.402 37.084,41.402 38.608,41.402 40.132,41.402 41.656,41.402 43.18,41.402 44.704,41.402 46.228,41.402 47.752,41.402 49.276,41.402 52.324,41.402 53.848,41.402 59.944,41.402 61.468,41.402 62.992,41.402 64.516,41.402 66.04,41.402 67.564,41.402 69.088,41.402 70.612,41.402 72.136,41.402 73.66,41.402 76.708,41.402 79.756,41.402 81.28,41.402 82.804,41.402 84.328,41.402 85.852,41.402 2.794,42.926 4.318,42.926 5.842,42.926 7.366,42.926 8.89,42.926 10.414,42.926 11.938,42.926 13.462,42.926 14.986,42.926 16.51,42.926 18.034,42.926 19.558,42.926 21.082,42.926 22.606,42.926 24.13,42.926 25.654,42.926 27.178,42.926 51.562,42.926 53.086,42.926 59.182,42.926 60.706,42.926 62.23,42.926 63.754,42.926 65.278,42.926 66.802,42.926 68.326,42.926 69.85,42.926 71.374,42.926 75.946,42.926 77.47,42.926 80.518,42.926 82.042,42.926 83.566,42.926 85.09,42.926 86.614,42.926 2.032,44.45 3.556,44.45 5.08,44.45 6.604,44.45 8.128,44.45 9.652,44.45 11.176,44.45 12.7,44.45 14.224,44.45 15.748,44.45 17.272,44.45 18.796,44.45 20.32,44.45 21.844,44.45 23.368,44.45 24.892,44.45 26.416,44.45 34.036,44.45 35.56,44.45 37.084,44.45 38.608,44.45 40.132,44.45 41.656,44.45 43.18,44.45 44.704,44.45 46.228,44.45 47.752,44.45 49.276,44.45 50.8,44.45 56.896,44.45 58.42,44.45 59.944,44.45 61.468,44.45 62.992,44.45 64.516,44.45 66.04,44.45 67.564,44.45 69.088,44.45 70.612,44.45 73.66,44.45 75.184,44.45 76.708,44.45 79.756,44.45 81.28,44.45 82.804,44.45 84.328,44.45 85.852,44.45 2.794,45.974 4.318,45.974 5.842,45.974 7.366,45.974 8.89,45.974 10.414,45.974 11.938,45.974 13.462,45.974 14.986,45.974 16.51,45.974 18.034,45.974 19.558,45.974 21.082,45.974 22.606,45.974 24.13,45.974 25.654,45.974 31.75,45.974 33.274,45.974 34.798,45.974 36.322,45.974 37.846,45.974 39.37,45.974 40.894,45.974 42.418,45.974 43.942,45.974 45.466,45.974 46.99,45.974 48.514,45.974 50.038,45.974 56.134,45.974 57.658,45.974 59.182,45.974 60.706,45.974 62.23,45.974 63.754,45.974 65.278,45.974 66.802,45.974 68.326,45.974 72.898,45.974 74.422,45.974 75.946,45.974 77.47,45.974 80.518,45.974 85.09,45.974 2.032,47.498 3.556,47.498 5.08,47.498 6.604,47.498 8.128,47.498 9.652,47.498 11.176,47.498 12.7,47.498 14.224,47.498 15.748,47.498 17.272,47.498 18.796,47.498 20.32,47.498 21.844,47.498 23.368,47.498 30.988,47.498 41.656,47.498 44.704,47.498 46.228,47.498 47.752,47.498 53.848,47.498 55.372,47.498 56.896,47.498 58.42,47.498 59.944,47.498 61.468,47.498 62.992,47.498 64.516,47.498 66.04,47.498 67.564,47.498 69.088,47.498 72.136,47.498 73.66,47.498 75.184,47.498 76.708,47.498 79.756,47.498 81.28,47.498 82.804,47.498 84.328,47.498 85.852,47.498 2.794,49.022 4.318,49.022 5.842,49.022 7.366,49.022 8.89,49.022 10.414,49.022 11.938,49.022 13.462,49.022 14.986,49.022 16.51,49.022 18.034,49.022 19.558,49.022 21.082,49.022 22.606,49.022 30.226,49.022 45.466,49.022 46.99,49.022 53.086,49.022 54.61,49.022 56.134,49.022 57.658,49.022 59.182,49.022 60.706,49.022 62.23,49.022 63.754,49.022 65.278,49.022 66.802,49.022 68.326,49.022 72.898,49.022 74.422,49.022 75.946,49.022 77.47,49.022 80.518,49.022 82.042,49.022 83.566,49.022 85.09,49.022 86.614,49.022 2.032,50.546 3.556,50.546 5.08,50.546 6.604,50.546 8.128,50.546 9.652,50.546 11.176,50.546 12.7,50.546 14.224,50.546 15.748,50.546 17.272,50.546 18.796,50.546 20.32,50.546 50.8,50.546 61.468,50.546 62.992,50.546 64.516,50.546 66.04,50.546 67.564,50.546 69.088,50.546 72.136,50.546 73.66,50.546 75.184,50.546 78.232,50.546 81.28,50.546 82.804,50.546 84.328,50.546 85.852,50.546 2.794,52.07 4.318,52.07 5.842,52.07 7.366,52.07 8.89,52.07 10.414,52.07 11.938,52.07 13.462,52.07 14.986,52.07 50.038,52.07 62.23,52.07 63.754,52.07 65.278,52.07 66.802,52.07 68.326,52.07 72.898,52.07 74.422,52.07 2.032,53.594 3.556,53.594 5.08,53.594 6.604,53.594 8.128,53.594 9.652,53.594 11.176,53.594 12.7,53.594 14.224,53.594 15.748,53.594 17.272,53.594 62.992,53.594 64.516,53.594 66.04,53.594 67.564,53.594 69.088,53.594 72.136,53.594 73.66,53.594 78.232,53.594 79.756,53.594 81.28,53.594 84.328,53.594 85.852,53.594 2.794,55.118 4.318,55.118 5.842,55.118 7.366,55.118 8.89,55.118 10.414,55.118 33.274,55.118 54.61,55.118 56.134,55.118 57.658,55.118 59.182,55.118 60.706,55.118 63.754,55.118 65.278,55.118 66.802,55.118 68.326,55.118 75.946,55.118 77.47,55.118 78.994,55.118 80.518,55.118 82.042,55.118 83.566,55.118 85.09,55.118 86.614,55.118 2.032,56.642 3.556,56.642 5.08,56.642 6.604,56.642 8.128,56.642 9.652,56.642 11.176,56.642 14.224,56.642 17.272,56.642 21.844,56.642 38.608,56.642 41.656,56.642 46.228,56.642 53.848,56.642 55.372,56.642 56.896,56.642 58.42,56.642 59.944,56.642 61.468,56.642 64.516,56.642 66.04,56.642 67.564,56.642 69.088,56.642 75.184,56.642 76.708,56.642 78.232,56.642 79.756,56.642 81.28,56.642 82.804,56.642 84.328,56.642 85.852,56.642 28.702,58.166 74.422,58.166 75.946,58.166 77.47,58.166 78.994,58.166 80.518,58.166 82.042,58.166 83.566,58.166 85.09,58.166 86.614,58.166 2.032,59.69 8.128,59.69 12.7,59.69 15.748,59.69 20.32,59.69 27.94,59.69 29.464,59.69 32.512,59.69 40.132,59.69 44.704,59.69 47.752,59.69 52.324,59.69 55.372,59.69 67.564,59.69 73.66,59.69 75.184,59.69 76.708,59.69 78.232,59.69 79.756,59.69 81.28,59.69 82.804,59.69 84.328,59.69 85.852,59.69 28.702,61.214 74.422,61.214 75.946,61.214 77.47,61.214 78.994,61.214 80.518,61.214 82.042,61.214 83.566,61.214 85.09,61.214 86.614,61.214 2.032,62.738 3.556,62.738 5.08,62.738 6.604,62.738 8.128,62.738 9.652,62.738 11.176,62.738 53.848,62.738 55.372,62.738 56.896,62.738 58.42,62.738 59.944,62.738 61.468,62.738 62.992,62.738 64.516,62.738 66.04,62.738 67.564,62.738 69.088,62.738 70.612,62.738 72.136,62.738 73.66,62.738 75.184,62.738 76.708,62.738 78.232,62.738 79.756,62.738 81.28,62.738 82.804,62.738 84.328,62.738 85.852,62.738 2.794,64.262 4.318,64.262 5.842,64.262 7.366,64.262 8.89,64.262 10.414,64.262 11.938,64.262 39.37,64.262 53.086,64.262 54.61,64.262 56.134,64.262 57.658,64.262 59.182,64.262 60.706,64.262 62.23,64.262 63.754,64.262 65.278,64.262 66.802,64.262 68.326,64.262 69.85,64.262 71.374,64.262 72.898,64.262 74.422,64.262 75.946,64.262 77.47,64.262 78.994,64.262 80.518,64.262 82.042,64.262 83.566,64.262 85.09,64.262 86.614,64.262 2.032,65.786 3.556,65.786 5.08,65.786 6.604,65.786 8.128,65.786 9.652,65.786 11.176,65.786 12.7,65.786 38.608,65.786 40.132,65.786 52.324,65.786 53.848,65.786 55.372,65.786 56.896,65.786 58.42,65.786 59.944,65.786 61.468,65.786 62.992,65.786 64.516,65.786 66.04,65.786 67.564,65.786 69.088,65.786 70.612,65.786 72.136,65.786 73.66,65.786 75.184,65.786 76.708,65.786 78.232,65.786 79.756,65.786 81.28,65.786 82.804,65.786 84.328,65.786 85.852,65.786 2.794,67.31 4.318,67.31 5.842,67.31 7.366,67.31 8.89,67.31 10.414,67.31 11.938,67.31 24.13,67.31 36.322,67.31 39.37,67.31 40.894,67.31 51.562,67.31 53.086,67.31 54.61,67.31 56.134,67.31 57.658,67.31 59.182,67.31 60.706,67.31 62.23,67.31 63.754,67.31 65.278,67.31 66.802,67.31 68.326,67.31 69.85,67.31 71.374,67.31 72.898,67.31 74.422,67.31 75.946,67.31 77.47,67.31 78.994,67.31 80.518,67.31 82.042,67.31 83.566,67.31 85.09,67.31 86.614,67.31 2.032,68.834 3.556,68.834 5.08,68.834 6.604,68.834 8.128,68.834 9.652,68.834 11.176,68.834 12.7,68.834 14.224,68.834 15.748,68.834 17.272,68.834 18.796,68.834 20.32,68.834 21.844,68.834 23.368,68.834 24.892,68.834 37.084,68.834 38.608,68.834 40.132,68.834 41.656,68.834 43.18,68.834 44.704,68.834 46.228,68.834 47.752,68.834 49.276,68.834 50.8,68.834 52.324,68.834 53.848,68.834 55.372,68.834 56.896,68.834 58.42,68.834 59.944,68.834 61.468,68.834 62.992,68.834 64.516,68.834 66.04,68.834 67.564,68.834 69.088,68.834 70.612,68.834 72.136,68.834 73.66,68.834 75.184,68.834 76.708,68.834 78.232,68.834 79.756,68.834 81.28,68.834 82.804,68.834 84.328,68.834 85.852,68.834 2.794,70.358 4.318,70.358 5.842,70.358 7.366,70.358 8.89,70.358 10.414,70.358 11.938,70.358 13.462,70.358 14.986,70.358 16.51,70.358 18.034,70.358 19.558,70.358 21.082,70.358 22.606,70.358 24.13,70.358 25.654,70.358 27.178,70.358 28.702,70.358 30.226,70.358 31.75,70.358 33.274,70.358 34.798,70.358 36.322,70.358 37.846,70.358 39.37,70.358 40.894,70.358 42.418,70.358 43.942,70.358 45.466,70.358 46.99,70.358 48.514,70.358 50.038,70.358 51.562,70.358 53.086,70.358 54.61,70.358 56.134,70.358 57.658,70.358 59.182,70.358 60.706,70.358 62.23,70.358 63.754,70.358 65.278,70.358 66.802,70.358 68.326,70.358 69.85,70.358 71.374,70.358 72.898,70.358 74.422,70.358 75.946,70.358 77.47,70.358 78.994,70.358 80.518,70.358 82.042,70.358 83.566,70.358 85.09,70.358 86.614,70.358
NetC100_1: C100.1 R100.1 | length 1.8
  Top Layer w0.3: R100.1 22.835,64.694 C100.1
NetC101_1: C101.1 R101.2 | length 1.1
  Top Layer w0.3: R101.2 C101.1
NetC102_1: C102.1 R102.1 | length 1.6
  Bottom Layer w0.3: C102.1 17.714,52.532 19.137,52.532 R102.1
NetC103_1: C103.1 R103.2 | length 1.7
  Bottom Layer w0.3: R103.2 24.704,53.208 25.598,53.208 25.953,52.852 26.198,52.852 C103.1
NetC104_1: C104.1 R104.1 | length 1.4
  Bottom Layer w0.3: C104.1 26.352,65.367 26.352,63.995 R104.1
NetC105_1: C105.1 R105.2 | length 1.8
  Bottom Layer w0.3: R105.2 29.159,53.289 30.937,53.289 C105.1
NetC106_1: C106.1 R106.1 | length 1.4
  Top Layer w0.3: R106.1 29.866,52.329 29.866,52.202 C106.1
NetC107_1: C107.1 R107.1 | length 1.5
  Top Layer w0.3: R107.1 32.443,52.502 32.489,52.456 32.489,52.017 C107.1
NetC108_1: C108.1 R108.2 | length 1.9
  Top Layer w0.3: C108.1@33.852,10.231 34.781,9.301 35.095,9.301 35.13,9.266 35.342,9.266 R108.2
NetC109_1: C109.1 R109.1 | length 1.9
  Top Layer w0.3: R109.1 30.251,9.017 C109.1
NetC110_1: C110.1 R112.2 | length 2
  Top Layer w0.3: C110.1 30.886,19.202 R112.2
NetC111_1: C111.1 R116.1 | length 1.3
  Top Layer w0.3: R116.1 31.699,3.525 32.203,3.022 C111.1
NetD100_2: D100.2 R110.1 | length 5.4
  Top Layer w0.508: R110.1 D100.2
NetD101_2: D101.2 R111.1 | length 5.5
  Top Layer w0.508: R111.1 77.495,13.06 77.541,13.106 D101.2
NetR113_1: R113.1 R117.1 SW100.2 SW100.4 | length 8.7
  Top Layer w0.508: R113.1 79.504,51.082 79.504,52.372 R117.1 SW100.2@82.382,52.374 ; SW100.2@82.383,52.374 SW100.4@86.883,52.374
NetR114_1: R114.1 R118.1 SW101.2 SW101.4 | length 8.7
  Top Layer w0.508: R114.1 79.504,38.361 79.504,39.647 R118.1 79.519,39.661 82.371,39.661 SW101.2 SW101.4
NetR115_1: R115.1 R119.1 SW102.2 SW102.4 | length 8.8
  Top Layer w0.508: R115.1 R119.1 R119.1@79.514,26.961 ; R119.1@79.514,26.911 R119.1@79.514,26.961 ; SW102.4 SW102.2 82.371,26.961 R119.1@79.514,26.961
RD: R108.1 U100.24 U101.6 | length 103
  Top Layer w0.3: U101.6 39.992,12.093 39.992,13.247 40.673,13.928 41.866,13.928 42.548,14.61 42.548,17.327 ; 42.545,17.33 42.792,17.577 43.294,17.577 43.444,17.577 ccw(c43.444,17.877) 43.744,17.877 43.744,22.28 cw(c43.994,22.28) 44.244,22.28 44.244,17.245 ccw(c44.494,17.245) 44.744,17.245 44.744,22.28 cw(c44.994,22.28) 45.244,22.28 45.244,17.385 ccw(c45.494,17.385) 45.744,17.385 45.744,22.28 cw(c45.994,22.28) 46.244,22.28 46.244,17.385 ccw(c46.494,17.385) 46.744,17.385 46.744,22.28 cw(c46.994,22.28) 47.244,22.28 47.244,17.385 ccw(c47.494,17.385) 47.744,17.385 47.744,22.28 cw(c47.994,22.28) 48.244,22.28 48.244,17.385 ccw(c48.494,17.385) 48.744,17.385 48.744,22.28 cw(c48.994,22.28) 49.244,22.28 49.244,17.385 ccw(c49.494,17.385) 49.744,17.385 49.744,21.358 cw(c49.994,21.358) 50.244,21.358 50.244,17.877 ccw(c50.544,17.877) 50.544,17.577 51.067,17.577 51.537,17.577 51.86,17.254 51.86,16.833 51.562,16.535 45.129,16.535 U100.24
RS: R116.2 U100.35 U101.4 | length 33
  Top Layer w0.3: U101.4 29.769,6.915 31.175,5.509 31.549,5.509 R116.2 31.803,5.463 35.359,5.463 40.202,10.306 56.789,10.306 59.042,12.559 U100.35
RST: U100.12 U101.2 | length 8.8
  Top Layer w0.3: U101.2 24.713,6.974 24.713,13.899 U100.12
SCREEN_LED: R111.2 U100.44 | length 7.9
  Top Layer w0.508: U100.44 70.465,13.945 75.306,13.945 76.099,13.152 76.149,13.152 76.195,13.106 R111.2
SD_DI: U100.27 U101.24 | length 55.6
  Top Layer w0.3: v2(44.856,52.426) 55.239,42.043 55.239,12.012 54.605,11.378 50.225,11.378 48.935,12.668 U100.27
  Bottom Layer w0.508: U101.24 44.714,53.264 44.714,52.568 v2(44.856,52.426)
SD_DO: U100.40 U101.25 | length 47.9
  Top Layer w0.3: v2(46.38,52.426) 46.532,52.274 46.532,51.868 64.122,34.278 U100.40
  Bottom Layer w0.508: U101.25 45.249,54.985 46.38,53.854 v2(46.38,52.426)
SD_SCK: U100.42 U101.26 | length 47.9
  Top Layer w0.3: v2(47.955,52.451) 48.107,52.299 48.107,51.36 64.948,34.519 64.948,16.922 U100.42
  Bottom Layer w0.508: U101.26 47.872,55.187 47.872,52.534 v2(47.955,52.451)
SD_SS: U100.75 U101.23 | length 3.6
  Top Layer w0.3: U101.23 40.169,57.237 41.262,58.33 U100.75
WR: R112.1 U100.22 U101.5 | length 122.4
  Top Layer w0.3: U101.5 32.333,6.974 32.333,17.635 32.631,17.932 32.781,17.932 ccw(c32.781,18.232) 33.081,18.232 33.081,24.28 cw(c33.331,24.28) 33.581,24.28 33.581,17.382 ccw(c33.831,17.382) 34.081,17.382 34.081,24.28 cw(c34.331,24.28) 34.581,24.28 34.581,17.382 ccw(c34.831,17.382) 35.081,17.382 35.081,24.28 cw(c35.331,24.28) 35.581,24.28 35.581,17.382 ccw(c35.831,17.382) 36.081,17.382 36.081,24.28 cw(c36.331,24.28) 36.581,24.28 36.581,17.382 ccw(c36.831,17.382) 37.081,17.382 37.081,24.28 cw(c37.331,24.28) 37.581,24.28 37.581,17.382 ccw(c37.831,17.382) 38.081,17.382 38.081,24.28 cw(c38.331,24.28) 38.581,24.28 38.581,17.382 ccw(c38.831,17.382) 39.081,17.382 39.081,24.28 cw(c39.331,24.28) 39.581,24.28 39.581,17.382 ccw(c39.831,17.382) 40.081,17.382 40.081,17.632 cw(c40.381,17.632) 40.381,17.932 40.538,17.932 41.134,17.337 41.262,17.209 U100.22
pads on no net: U100.1 U100.2 U100.3 U100.4 U100.5 U100.6 U100.7 U100.8 U100.10 U100.15 U100.16 U100.17 U100.18 U100.19 U100.20 U100.21 U100.23 U100.25 U100.26 U100.29 U100.30 U100.32 U100.33 U100.34 U100.36 U100.38 U100.45 U100.46 U100.47 U100.48 U100.49 U100.50 U100.51 U100.52 U100.53 U100.55 U100.56 U100.57 U100.58 U100.59 U100.60 U100.61 U100.63 U100.65 U100.66 U100.67 U100.68 U100.70 U100.72 U100.73 U100.74 U100.76 U100.77 U100.78 U100.79 U100.80 U100.81 U100.82 U100.83 U100.85 U100.87 U100.89 U100.91 U100.92 U100.94 U100.95 U100.96 U100.97 U100.100 U101.1 U101.7 U101.9 U101.11 U101.12 U101.13 U101.14 U101.27 U101.28

## Polygon pours and split planes (outlines as drawn)
GND on Bottom Layer "NONET_L-01_P-001" (solid, remove dead copper, pour order 2): 0,0 88.138,0 88.138,71.628 0,71.628
GND on Top Layer "NONET_L-01_P-001" (solid, remove dead copper, pour order 0): 0,0 88.138,0 88.138,71.628 0,71.628

## Keep-outs
Keep-Out Layer:
  the board outline again, w0.127

## Other copper
Top Layer:
  pour cut-out: 44.907,52.375 48.031,52.375 48.031,51.435 64.948,34.519 64.948,16.922 66.662,15.208 64.122,15.208 64.122,34.303 56.382,42.043 55.239,42.043

## Silkscreen, mask and mechanical layers (free items; w line width, h text height)
Top Overlay:
  text "Simonas Riauka, / Arnas Piaulokas, / Aurimas Junevičius / EEI-0/3, 2023" at 39.319,64.541 h1.02
  text "UP" at 83.718,43.078 h1.02
  text "OK" at 83.947,30.302 h1.02
  text "DOWN" at 82.702,17.45 h1.02
  text "ON" at 83.287,9.83 h1.02
  text "PWR" at 82.55,4.674 h1.02

## Text inside footprints (layer, text, board x,y; h text height)
U100: Top Overlay "2" at 1.473,60.554 h1.02; Top Overlay "1" at 1.829,57.861 h1.02; Top Overlay "20" at 28.55,65.126 h1.02 r90; Top Overlay "19" at 28.55,62.814 h1.02 r90; Top Overlay "2" at 36.522,17.208 h1.02 r90; Top Overlay "1" at 36.622,10.108 h1.02 r90; Top Overlay "30" at 72.314,17.17 h1.02 r90; Top Overlay "29" at 72.322,9.108 h1.02 r90; Top Overlay "15" at 32.487,9.093 h1.02 r90; Top Overlay "16" at 34.138,14.656 h1.02 r90; Top Overlay "1" at 13.722,10.308 h1.02 r90; Top Overlay "2" at 13.716,17.018 h1.02 r90; Top Overlay "2" at 31.471,65.253 h1.02 r90; Top Overlay "1" at 31.471,62.89 h1.02 r90; Top Overlay "72" at 73.99,60.554 h1.02; Top Overlay "71" at 73.939,57.861 h1.02